# Altium PCB single_esc.PcbDoc
Units mil, origin at the board's own origin, x right, y up, seen from the top; angles counter-clockwise.
Board outline 2283.46 x 1338.58 mil, 2 copper layers (Top Layer, Bottom Layer); 32 components, 35 nets, 111 pads, 40 vias.
Unrouted connection lines stored in the file: 4.
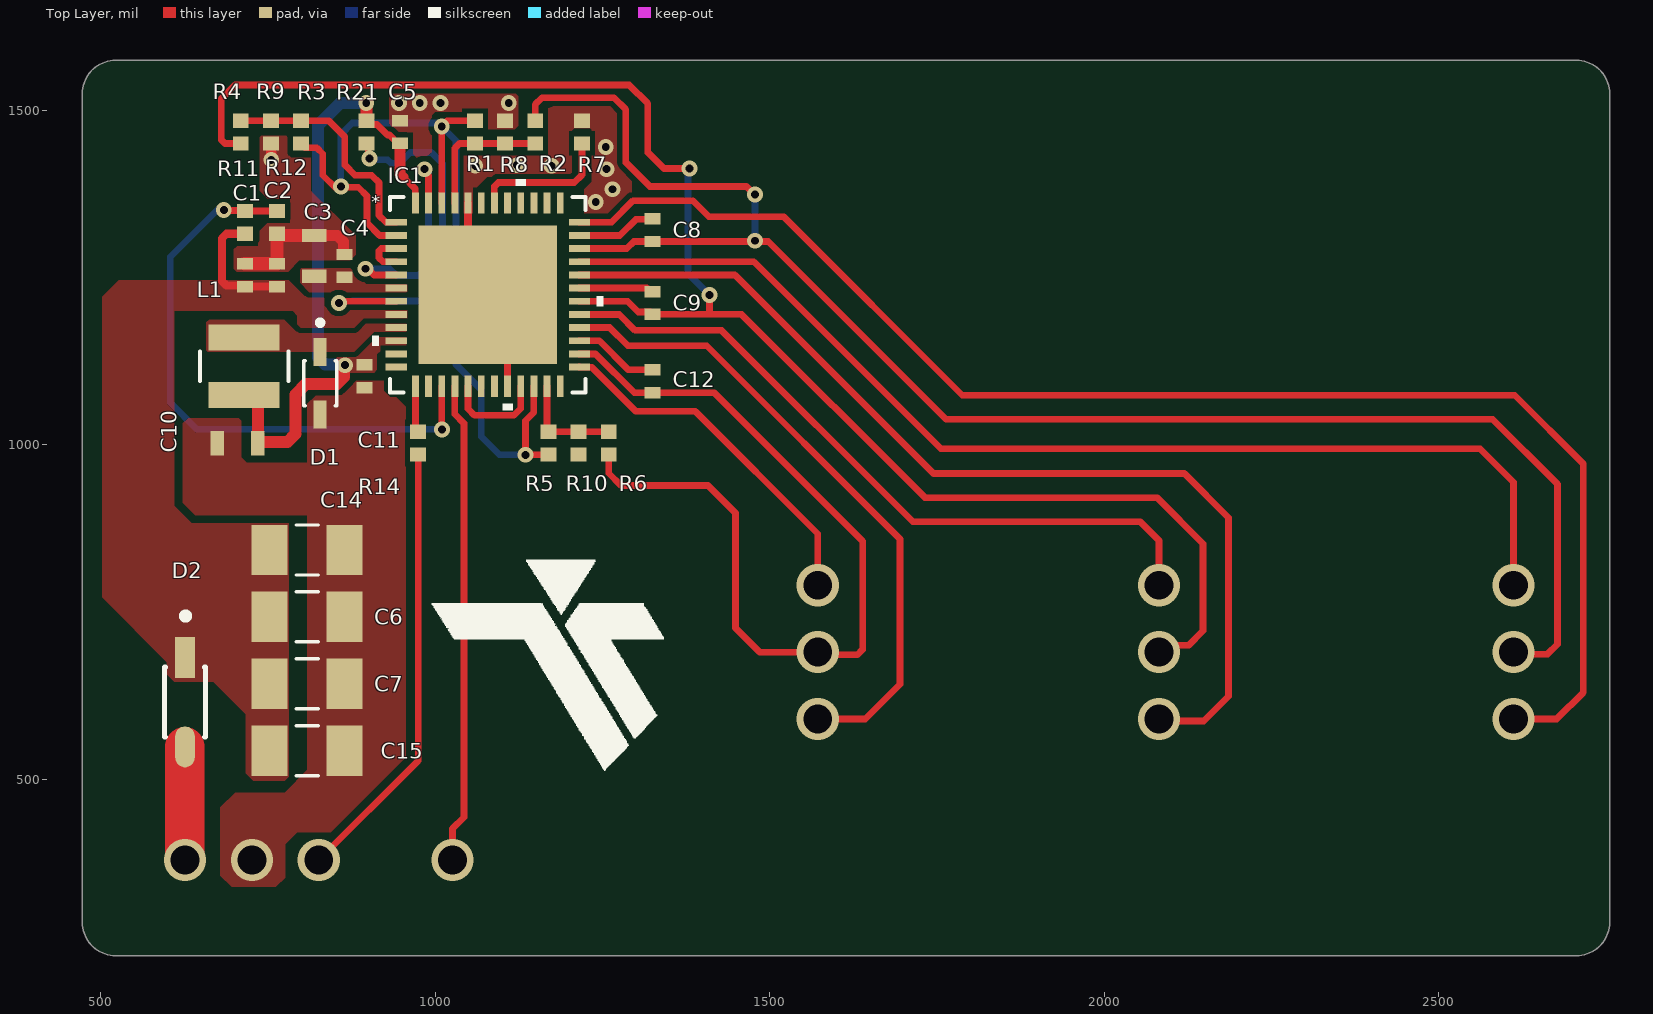
[diagram p0: Top Layer view]
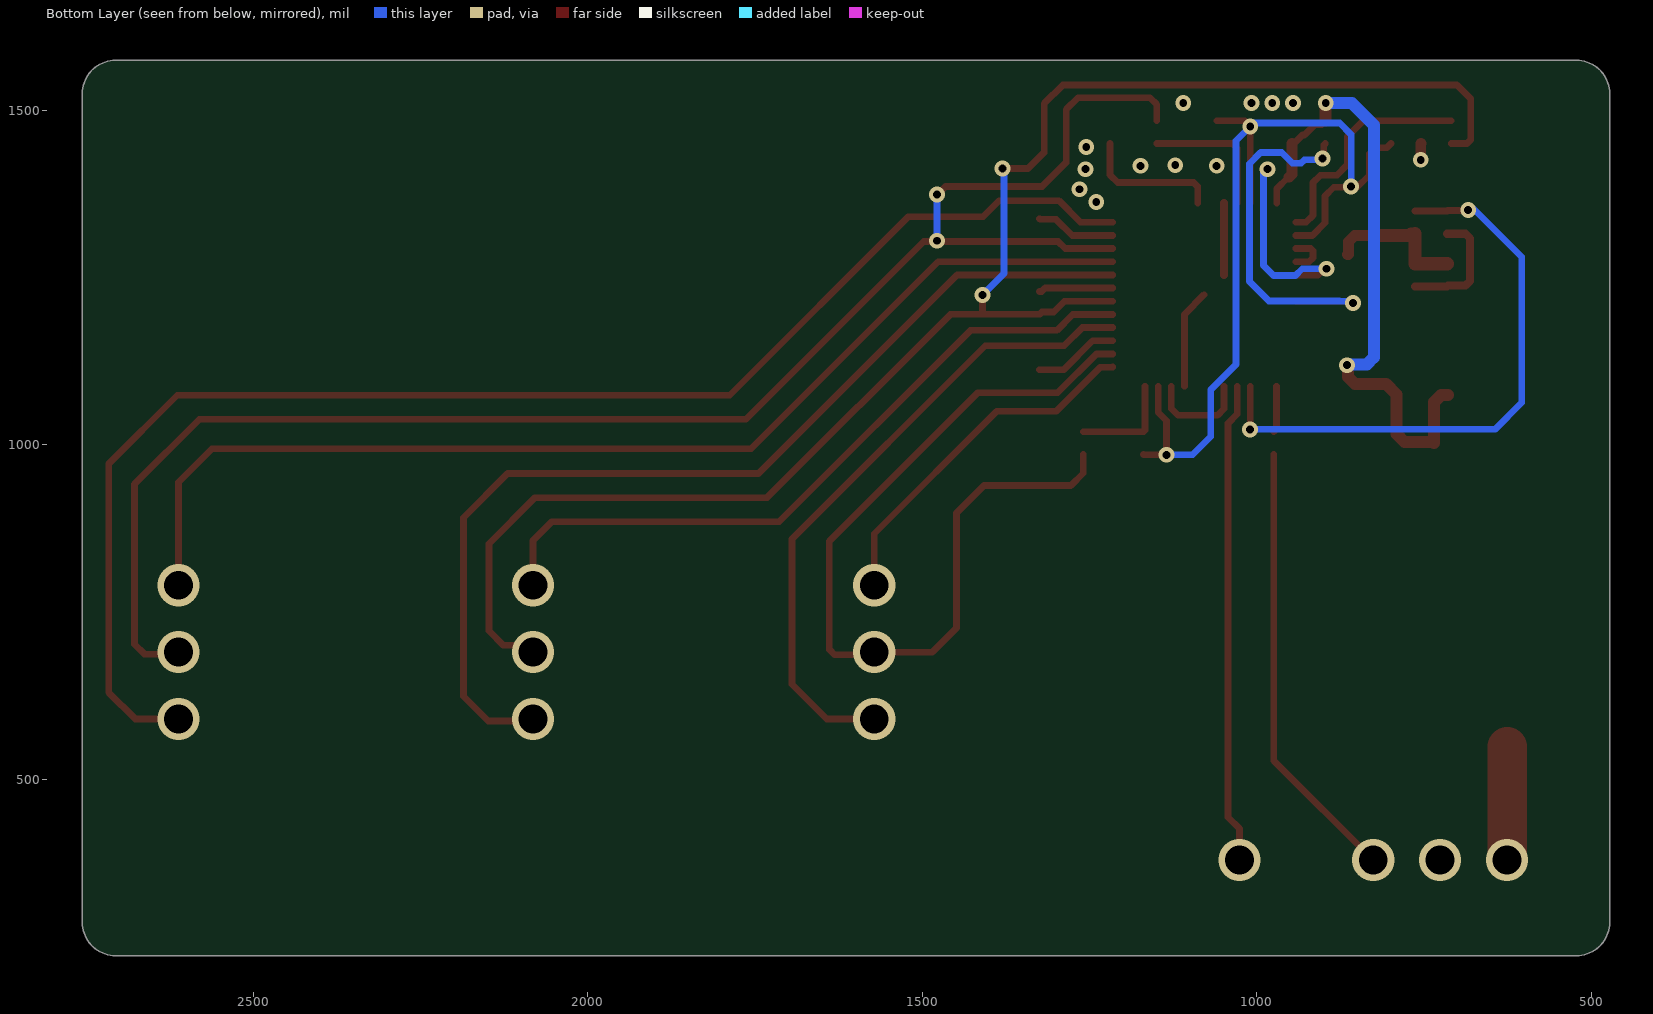
[diagram p1: Bottom Layer view, seen from below]
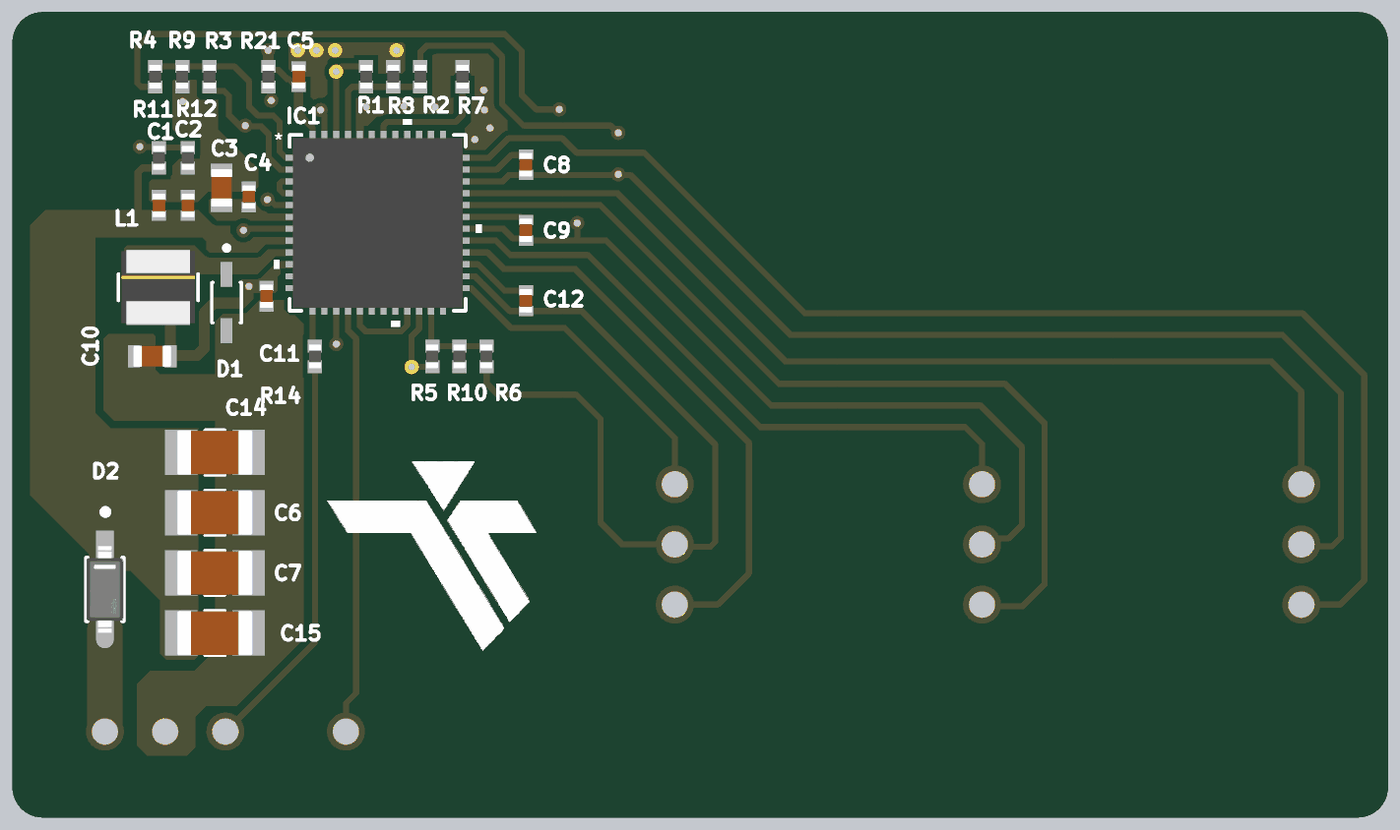
[diagram p2: 3D render of the assembled board from above, using the file's embedded part models]

## Layer stack, top to bottom
Top Solder: solder mask 0.4, Solder Resist, Dk 3.5
Top Layer: signal copper 1.4
Dielectric 1: dielectric 12.6, FR-4, Dk 4.8
Bottom Layer: signal copper 1.4
Bottom Solder: solder mask 0.4, Solder Resist, Dk 3.5

## Board outline
472.44,286.22 472.44,1496.06 472.44,1524.8 cw(c522.44,1524.8) 522.44,1574.8 551.18,1574.8 2705.91,1574.8 cw(c2705.91,1524.8) 2755.91,1524.8 2755.91,286.22 cw(c2705.91,286.22) 2705.91,236.22 522.44,236.22 cw(c522.44,286.22)

## Design rules (kind name [scope] priority, off if disabled: settings)
BoardOutlineClearance [All] p1: gap=8 ignorepadtopadclearanceinfootprint=FALSE
Clearance [All] p1: gap=8 ignorepadtopadclearanceinfootprint=TRUE
MinimumAnnularRing [All] p1: minimumring=7.87
PlaneConnect [All] p1: planeconnectstyle=Direct reliefexpansion=20 reliefentries=4 reliefconductorwidth=10 reliefairgap=10
PolygonConnect [All] p1: connectstyle=Direct reliefconductorwidth=10 reliefentries=4 polygonreliefangle="90 Angle" airgapwidth=10
RoutingVias [All] p1: holewidth=11.81 width=23.62 viastyle="Through Hole" minholewidth=0.1 minwidth=3.94 maxholewidth=7874.02 maxwidth=7874.02
SolderMaskExpansion [All] p1: expansion=0 istentingtop=FALSE
SupplyNets "Schematic Supply Nets_2" [InNet('BAT')] p1: voltage=0.000
SupplyNets "Schematic Supply Nets_1" [InNet('GND')] p2: voltage=0.000
Width [All] p1: maxlimit=7874.02 minlimit=8 preferedwidth=10
29 further rules are at their usual default settings.

## Components (designator, comment, footprint, x,y, rotation, side; value= is the part's Value field where it differs from the comment)
C1 "0.1uF" CAPC1005X55N 715.48,1253.51 r270 top
C2 "0.1uF" CAPC1005X55N 763.48,1253.51 r270 top
C3 "10uF" CAPC1608X90N 819.48,1282.51 r270 top
C4 "0.1uF" CAPC1005X55N 864.48,1267.51 r270 top
C5 "0.1uF" CAPC1005X55N 947.48,1467.51 r270 top
C6 "10uF" CAPC3216X190N 808.48,742.78 r180 top
C7 "10uF" CAPC3216X190N 808.48,642.78 r180 top
C8 "680nF" CAPC1005X55N 1325,1321 r90 top
C9 "680nF" CAPC1005X55N 1325,1212 r90 top
C10 "47uF" CAPC1608X90N 704.48,1002.51 r0 top
C11 "0.1uF" CAPC1005X55N 894.48,1102.51 r90 top
C12 "680nF" CAPC1005X55N 1325,1095 r90 top
C14 "10uF" CAPC3216X190N 808.48,842.78 r180 top
C15 "10uF" CAPC3216X190N 808.48,542.78 r180 top
D1 "B5819WS-TP" SOD2512X115N 828,1092 r270 top
D2 "BZT52C16-13-F" FP-SOD123-IPC_A 625.96,615.22 r270 top
IC1 "STSPIN32F0ATR" VFQFPN-48_7x7x1mm_STM 1078.69,1224.41 r0 top
L1 "22uH" IND_BOURNS_SRN3015 714.48,1117.51 r270 top
R1 "10K" RESC1005X37N 1059.48,1467.51 r90 top
R2 "10K" RESC1005X37N 1149.48,1467.51 r270 top
R3 "10K" RESC1005X37N 799.48,1467.51 r270 top
R4 "10K" RESC1005X37N 709.48,1467.51 r90 top
R5 "10K" RESC1005X37N 1169.48,1002.51 r270 top
R6 "10K" RESC1005X37N 1259.48,1002.51 r90 top
R7 "10K" RESC1005X37N 1219.48,1467.51 r270 top
R8 "1K" RESC1005X37N 1104.48,1467.51 r90 top
R9 "1K" RESC1005X37N 754.48,1467.51 r270 top
R10 "1K" RESC1005X37N 1214.48,1002.51 r270 top
R11 "100K" RESC1005X37N 715.48,1332.51 r270 top
R12 "10K" RESC1005X37N 763.48,1332.51 r90 top
R14 "1K" RESC1005X37N 974.48,1002.51 r90 top
R21 "10K" RESC1005X37N 897.48,1467.51 r90 top

## Footprints (in the part's own frame and the unit in brackets; to place one, negate y for a bottom-side part, rotate by r counter-clockwise, add the part's x,y. Pads: shape width x height; smd on the part's side, far side on the other; paste and mask are expansions set on the pad)
CAPC1005X55N [mil]
  rect 17x23.62 smd: 1(-17.01,0) 2(17.01,0)
  body extent -20,-11 20,11, height 20
CAPC1608X90N [mm]
  rect 0.508x0.93 smd: 1(-0.77,0) 2(0.77,0)
  body extent -0.8,-0.44 0.8,0.46, height 0.81
CAPC3216X190N [mm]
  rect 1.37x1.91 smd: 1(-1.421,0) 2(1.421,0)
  silkscreen extent -0.42,-0.95 0.42,0.95, body extent -1.6,-0.95 1.6,0.95, height 1.56
FP-SOD123-IPC_A [mil]
  rect 61.32x29.23 smd paste+0 mask+0: 1(-66.94,0)
  rrect100% 61.32x29.23 smd paste+0 mask+0: 2(66.94,0)
  silkscreen extent -134,-31 52,31, body extent -117,-50 117,50, height 10
IND_BOURNS_SRN3015 [mil]
  rect 39x106 smd paste+0 mask+0: 1(-43,0) 2(43,0)
  silkscreen extent -22,-66 22,66, body extent -61,-61 61,61, height 59
RESC1005X37N [mm]
  rect 0.54x0.6 smd: 1(-0.432,0) 2(0.432,0)
  body extent -0.5,-0.25 0.5,0.25, height 0.37
SOD2512X115N [mm]
  rect 1.05x0.5 smd: A(1.185,0) C(-1.185,0)
  silkscreen extent -2.4,-0.63 0.85,0.63
VFQFPN-48_7x7x1mm_STM [mm]
  rect 0.808x0.255 smd paste+0 mask+0: 1(-3.477,2.75) 2(-3.477,2.25) 3(-3.477,1.75) 4(-3.477,1.25) 5(-3.477,0.75) 6(-3.477,0.25) 7(-3.477,-0.25) 8(-3.477,-0.75) 9(-3.477,-1.25) 10(-3.477,-1.75) 11(-3.477,-2.25) 12(-3.477,-2.75) 25(3.477,-2.75) 26(3.477,-2.25) 27(3.477,-1.75) 28(3.477,-1.25) 29(3.477,-0.75) 30(3.477,-0.25) 31(3.477,0.25) 32(3.477,0.75) 33(3.477,1.25) 34(3.477,1.75) 35(3.477,2.25) 36(3.477,2.75)
  rect 0.255x0.808 smd paste+0 mask+0: 13(-2.75,-3.477) 14(-2.25,-3.477) 15(-1.75,-3.477) 16(-1.25,-3.477) 17(-0.75,-3.477) 18(-0.25,-3.477) 19(0.25,-3.477) 20(0.75,-3.477) 21(1.25,-3.477) 22(1.75,-3.477) 23(2.25,-3.477) 24(2.75,-3.477) 37(2.75,3.477) 38(2.25,3.477) 39(1.75,3.477) 40(1.25,3.477) 41(0.75,3.477) 42(0.25,3.477) 43(-0.25,3.477) 44(-0.75,3.477) 45(-1.25,3.477) 46(-1.75,3.477) 47(-2.25,3.477) 48(-2.75,3.477)
  rect 5.258x5.258 smd paste-2.629 mask+0: 49(0,0)
  silkscreen extent -4.39,-4.39 4.39,4.39, body extent -3.58,-3.58 3.58,3.58, height 0.99

## Part data
C1 C2 C4 C5 C8 C9 C11 C12: library part GRM1555C1H222JA01D, Package=None, Availability=Unavailable, MP=GRM1555C1H222JA01D, Price=None
C3 C10: library part GRM188R71E224JA88D, "SMD Capacitor X7R(EIA) with Capacitance: 0.22uF Tol. 5%. Rated Voltage: 25Vdc", Package=None, Availability=Unavailable, MP=GRM188R71E224JA88D, Price=None
C6 C7 C14 C15: library part GRM31CC80G227ME11K, "Ceramic Capacitor", Package=None, Availability=Unavailable, MP=GRM31CC80G227ME11K, Price=None
D1: Package=None, Availability=Unavailable, MF="{'manufacturer': u'Micro Commercial Components'}", MP=B5819WS-TP, Price=None
D2: library part CMP-12792-000033-1, "DIODE ZENER 16V 500MW SOD123", Max Operating Temperature=150°C, Max Power Dissipation=500mW, Max Reverse Leakage Current=100nA, Min Operating Temperature=-65°C, Package Quantity=10000, Test Current=5mA, Tolerance=6%, Zener Voltage=16V, Contact Plating=Tin, Element Configuration=Single, ESD Protection=No, Impedance=40R, Mount="Surface Mount", Number of Pins=2, Packaging="Tape and Reel", Power Dissipation=500mW, Power Rating=500mW, RoHS Compliant=Yes, Series=-, Voltage Tolerance=6%
IC1: "Integrated Circuit", Manufacturer_Name=STMicroelectronics, Mouser Part Number=511-STSPIN32F0ATR, Arrow Part Number=STSPIN32F0ATR, Arrow Price/Stock=https://www.arrow.com/en/products/stspin32f0atr/stmicroelectronics, Datasheet Link=http://www.st.com/content/ccc/resource/technical/document/datasheet/group3/3d/88/0f/d1/3f/0c/49/80/DM00406030/files/DM00406030.pdf/jcr:content/translations/en.DM00406030.pdf, Height=1mm, Manufacturer_Part_Number=STSPIN32F0ATR, Mouser Price/Stock=https://www.mouser.co.uk/ProductDetail/STMicroelectronics/STSPIN32F0ATR?qs=1mbolxNpo8flc7yUpKWOVQ%3D%3D
L1: library part SRN3015-220M, "No Description Available", Mfr_Name="Bourns Electronics", Copyright="Copyright (C) 2022 Ultra Librarian. All rights reserved.", Digi-Key_Part_Number_1=SRN3015-220MCT-ND, Digi-Key_Part_Number_2=SRN3015-220MDKR-ND, Digi-Key_Part_Number_3=SRN3015-220MTR-ND, Manufacturer_Part_Number=SRN3015-220M, RefDes=RefDes, Type=DEV
R1 R2 R3 R4 R5 R6 R7 R8 R9 R10 R11 R12 R14 R21: library part RE0402BRE07330KL, Package=None, Availability=Unavailable, MF="{'manufacturer': u'Yageo'}", MP=RE0402BRE07330KL, Price=None

## Via types
v1: diameter 23.62, hole 11.81, Top Layer to Bottom Layer, tented both sides, 21 vias
v2: diameter 62.99, hole 43.31, Top Layer to Bottom Layer, 13 vias
v3: diameter 23.62, hole 11.81, Top Layer to Bottom Layer, 6 vias

## Nets (pads, with @x,y where several pads share a name; then routed paths per layer and width w, separated by ;. In a path a pad name is that pad's centre, name@x,y a point inside that pad or via, vN(x,y) a via of type N, cw(c..) or ccw(c..) an arc to the next point about the centre after c; other vN are vias at no path point)
3V32: C5.2 C10.2 C11.2 IC1.10 IC1.48 L1.2 R21.2 | length 976.5
  Top Layer w10: R21.2 903.11,1478.89 913.11,1478.89 928.98,1463.02 931.66,1463.02 944.17,1450.5 C5.2 ; 952,1400 953,1400 970.41,1382.59 IC1.48
  Top Layer w16: C5.2 947.48,1404.52 952,1400
  Top Layer w18: L1.2 724.3,1074.51 734.8,1064.01 C10.2 ; C10.2@734.8,1003 735.8,1004 779,1004 791,1016 791,1075 807,1091 853.38,1091 863.92,1101.54 863.92,1117.92 v1(865,1119) ; v1(897,1511) 897.24,1510.76 897.24,1484.76 R21.2
  Bottom Layer w18: v1(865,1119) 863.92,1120.08 835.54,1120.08 825,1130.62 825,1478 858,1511 v1(897,1511)
BAT: C1.2 C2.2 C6.2 C7.2 C14.2 C15.2 D2.1 IC1.8 R11.2 | length 186.9
  Top Layer w12: R11.2 688.03,1315.5 681,1308.47 681,1245.03 688.03,1238 713.98,1238 C1.2 C2.2
BEMFA2: IC1.45 R1.1 R2.2 R8.1 | length 205.1
  Top Layer w10: IC1.45 1029.48,1443.48 1036.5,1450.5 R1.1 R2.2
BEMFB2: IC1.1 R3.1 R4.2 R9.1 | length 348.5
  Top Layer w10: R4.2 R9.1 R3.1 840.48,1484.52 865,1460 865,1418 880,1403 905,1403 916,1392 916,1343 926.3,1332.7 IC1.1
BEMFC2: IC1.23 R5.1 R6.2 R10.1 | length 158.9
  Top Layer w10: IC1.23 1167.29,1021.71 R5.1 R10.1 R6.2
BOOT02: IC1.42 R7.2 | length 210
  Top Layer w10: IC1.42 1088.54,1386.14 1094.4,1392 1208,1392 1219.48,1403.48 R7.2
CLK2: IC1.38
CURRENT: IC1.16 | length 721.1
  Top Layer w10: v2(1026,379) 1026,426.2 1043,443.2 1043,1032.05 1029.48,1045.57 IC1.16
ESC2: R14.1 | length 668
  Top Layer w10: v2(825.96,379) 974.48,527.52 R14.1
GHA2: IC1.33 | length 1686.9
  Top Layer w10: IC1.33 1476.37,1273.63 1756,994 2562,994 2611.96,944.04 v2(2611.96,790)
GHB2: IC1.29 | length 1073.3
  Top Layer w10: IC1.29 1275.11,1194.89 1299,1171 1428,1171 1713.96,885.04 2053.96,885.04 2081.96,857.04 v2(2081.96,790)
GHC2: IC1.25 | length 536.6
  Top Layer w10: IC1.25 1233.96,1116.13 1300.09,1050 1389,1050 1571.96,867.04 v2(1571.96,790)
GLA2: IC1.36 | length 2140
  Top Layer w10: IC1.36 1263.68,1332.68 1296,1365 1385,1365 1409,1341 1521,1341 1788,1074 2614,1074 2716.54,971.46 2716.54,629.92 2676.61,590 v2(2611.96,590)
GLB2: IC1.32 | length 1508.3
  Top Layer w10: IC1.32 1448.06,1253.94 1745,957 2120,957 2186,891 2186,624 2149,587 2084.96,587 v2(2081.96,590)
GLC2: IC1.28 | length 972
  Top Layer w10: IC1.28 1260.8,1175.2 1288,1148 1406,1148 1695,859 1695,642 1643,590 v2(1571.96,590)
GND: C1.1 C2.1 C3.1 C4.1 C5.1 C6.1 C7.1 C10.1 C11.1 C14.1 C15.1 D1.A IC1.20 IC1.44 IC1.49 R7.1 R8.2 R9.2 R10.2 R12.1 | length 498.8
  Top Layer w10: IC1.49 1108.22,1194.89 IC1.20
  Top Layer w12: IC1.49@1049.17,1253.94 IC1.44
  Top Layer w16: R9.2 754.74,1450.24 754.74,1426.26 v1(755,1426) ; C3.1 853.63,1312.82 863,1303.45 863,1285.02 863.5,1284.52 C4.1
  Top Layer w20: C1.1 C2.1 R12.1 764.11,1314.87 769.13,1314.87 771.18,1312.82 C3.1
  other v1: 1240,1363 1265,1382 1256,1412 1060,1417 1174,1417 1122,1418 1255,1445
  other v2: 725.96,379
  other v3: 946,1511 977,1511 1008,1511 1110,1511
IO2: IC1.37
MOTOR2A: C8.1 IC1.34 R2.1 | length 2461.7
  Top Layer w10: R2.1 1149.48,1508.48 1160,1519 1267,1519 1285,1501 1285,1422 1321,1386 1465.33,1386 1477.33,1374 v1(1478,1374) ; IC1.34 1286.31,1293.31 1296.99,1303.99 C8.1 1498.01,1303.99 1764,1038 2581,1038 2677.84,941.16 2677.84,701.84 2663,687 2614.96,687 v2(2611.96,690)
  Bottom Layer w10: v1(1478,1305) v1(1478,1374)
MOTOR2B: C9.1 IC1.30 R4.1 | length 2420.2
  Top Layer w10: R4.1 685.86,1450.5 680,1456.36 680,1517 701,1538 1290,1538 1318,1510 1318,1437 1342,1413 v1(1380,1413) ; IC1.30 1287.43,1214.57 1303.51,1198.49 1321.5,1198.49 C9.1 1409,1194.99 ; v1(1410,1224) 1410,1195.99 1409,1194.99 ; v2(2081.96,690) 2092.1,700.14 2126.14,700.14 2148,722 2148,852 2079,921 1732,921 1458.01,1194.99 1409,1194.99
  Bottom Layer w10: v1(1380,1413) 1378,1411 1378,1256 v1(1410,1224)
MOTOR2C: C12.1 IC1.26 R6.1 | length 1325.3
  Top Layer w10: IC1.26 1239.73,1135.82 1297.55,1077.99 C12.1 1417.01,1077.99 1639,856 1639,694 1631,686 1575.96,686 v2(1571.96,690) 1485,690 1449,726 1449,898 1408,939 1278,939 1259.48,957.52 R6.1
NetC8_2: C8.2 IC1.35 | length 119.8
  Top Layer w10: IC1.35 1276,1313 1300,1337 1323.99,1337 C8.2
NetC9_2: C9.2 IC1.31 | length 111.6
  Top Layer w10: IC1.31 1316.44,1234.26 1321.69,1229.01 C9.2
NetC12_2: C12.2 IC1.27 | length 127.4
  Top Layer w10: IC1.27 1245.48,1155.52 1288.99,1112.01 C12.2
NetD1_C: D1.C IC1.9 L1.1
NetD2_2: D2.2 | length 169.3
  Top Layer w59.06: v2(625.96,379) D2.2
NetIC1_3: IC1.3 IC1.4 | length 65.9
  Top Layer w10: IC1.4 921.86,1273.64 916,1279.5 916,1290 919.3,1293.3 IC1.3
NetIC1_7: IC1.7 R21.1 | length 581.1
  Top Layer w10: v1(856,1212) 858.56,1214.56 IC1.7 ; R21.1 899.74,1448.24 899.74,1430.07 v1(902,1427.81)
  Bottom Layer w10: v1(856,1212) 858.61,1214.61 876.61,1214.61 877,1215 982,1215 1011,1244 1011,1420.09 994.28,1436.81 962.81,1436.81 947,1421 933.81,1421 928.81,1426 903.81,1426 v1(902,1427.81)
NetIC1_13: IC1.13 R14.2 | length 69.7
  Top Layer w10: IC1.13 970.44,1023.56 R14.2
PA62: IC1.17 IC1.21 | length 153.9
  Top Layer w10: IC1.17 1049.17,1053.83 1059,1044 1117.54,1044 1127.91,1054.36 IC1.21
PF12: IC1.5 IC1.47 | length 355
  Top Layer w10: v1(895.67,1263.14) 899.35,1263.14 908.55,1253.94 IC1.5 ; v1(984,1412) 984,1408.31 990.11,1402.2 IC1.47
  Bottom Layer w10: v1(895.67,1263.14) 932.11,1263.14 942.25,1253 975,1253 990,1268 990,1407 985,1412 v1(984,1412)
TELEM: IC1.40
TP: IC1.41
VG2: IC1.2 IC1.22 IC1.46 R1.2 R3.2 R5.2 | length 1355.1
  Top Layer w10: R3.2 806.11,1443.87 823.13,1443.87 832,1435 832,1403 850,1385 885,1385 898,1372 898,1332 917,1313 IC1.2 ; IC1.46 v3(1009.8,1475.8) 1018.52,1484.52 R1.2 ; IC1.22 1147.59,1048.59 1135,1036 v3(1135,985) 1135.25,985.25 1169.23,985.25 R5.2
  Bottom Layer w10: v1(859,1386) 859,1464 876,1481 1004.59,1481 v3(1009.8,1475.8) 1031,1454.59 1031,1120 1069,1082 1069,1012 1096,985 v3(1135,985)
VOLTSENSE: IC1.15 R11.1 R12.2 | length 895.1
  Top Layer w10: v1(684,1351) 684.74,1350.26 714.74,1350.26 R11.1 R12.2 ; IC1.15 1009.81,1023.19 v1(1010,1023)
  Bottom Layer w10: v1(684,1351) 683,1352 675,1352 604,1281 604,1063 644,1023 v1(1010,1023)
VREG122: C3.2 C4.2 IC1.6
pads on no net: IC1.11 IC1.12 IC1.14 IC1.18 IC1.19 IC1.24 IC1.39 IC1.43

## Polygon pours and split planes (outlines as drawn)
GND on Top Layer "GND_L01_P009" (solid, pour order 9): 931,1476 931,1529 1116,1529 1124,1521 1124,1477 1119,1472 1075,1472 1075,1498 1000,1498 995,1493 995,1434 989,1428 969,1428 963,1434 963,1462 957,1468 939,1468 932,1475
GND on Top Layer "GND_L01_P008" (solid, pour order 8): 1223,1382 1223,1343 1262,1343 1294,1375 1294,1399 1276,1417 1276,1496 1263,1509 1168,1509 1168,1441 1163,1436 1045,1436 1036,1427 1036,1385 1042,1379 1042,1346 1056,1346 1056,1379 1078,1401 1198,1401 1204,1407 1204,1469 1208,1473 1232,1473 1234,1471 1234,1393
GND on Top Layer "GND_L01_P007" (solid, pour order 7): 738,1460 740,1462 777,1462 779,1460 779,1435 785,1429 814,1429 814,1379.61 881,1313.61 881,1276 797,1276 780,1259 703,1259 699,1263 699,1292 705,1298 731,1298 738,1305 738,1320 750,1332 779,1332 784,1337 784,1362 779,1367 751,1367 738,1380
GND on Top Layer "GND_L01_P006" (solid, pour order 6): 706,1040 631,1040 623,1032 623,913 641,895 828,895 828,973 718,973 710,981 710,1036
GND on Top Layer "GND_L01_P005" (solid, pour order 5): 882,1096 860,1074 822,1074 809,1061 809,514 775,480 701,480 679,458 679,356 696,339 762,339 776,353 776,403 794,421 844,421 956,533 956,1057 942,1071 933,1071 923,1081 923,1096
BAT on Top Layer "BAT_L01_P004" (solid, pour order 4): 781,883 781,504 775,498 728,498 717,509 717,597 668,646 610,646 599,657 599,675 502,772 502,1221 527,1246 722,1246 722,1200 610,1200 610,909 636,883
3V32 on Top Layer "3V32_L01_P003" (solid, pour order 3): 957,1161 912,1161 885,1134 857,1134 852,1129 852,1108 909,1108 913,1112 913,1135 925,1147 957,1147
NetD1_C on Top Layer "NETD1_C_L01_P002" (solid, pour order 2): 957,1181 896,1181 884,1169 792,1169 774,1187 662,1187 658,1183 658,1141 660,1139 879,1139 909,1169 957,1169
BAT on Top Layer "BAT_L01_P001" (solid, pour order 1): 958,1201 841,1201 834,1208 834,1219 831,1222 805,1222 781,1246 696,1246 693,1243 693,1206 699,1200 787,1200 794,1193 794,1180 799,1175 879,1175 893,1189 958,1189
VREG122 on Top Layer "VREG122_L01_P000" (solid, pour order 0): 957,1240 958,1239 958,1229 957,1228 812,1228 798,1242 798,1262 800,1264 873,1264 897,1240 911,1240

## Silkscreen, mask and mechanical layers (free items; w line width, h text height)
Top Overlay:
  drawing of 21 lines, arcs and shapes, not listed
Bottom Overlay:
  region: 1493.77,855.9 1493.82,855.68 1494.08,855.77 1494.12,855.9 1493.99,856.03 1493.77,855.98
Mechanical 1:
  the board outline again, w10

## Text inside footprints (layer, text, board x,y; h text height)
IC1: Top 3D Body "*" at 945.19,1317.52 h50; Top Overlay "*" at 904.48,1352.51 h20